# Altium PCB TankNode-PcbDoc.PcbDoc (part 1 of 2)
Units mm, origin at the board's own origin, x right, y up, seen from the top; angles counter-clockwise.
Board outline 71.69 x 57.78 mm, 2 copper layers (Top Layer, Bottom Layer); 78 components, 47 nets, 269 pads, 343 vias.
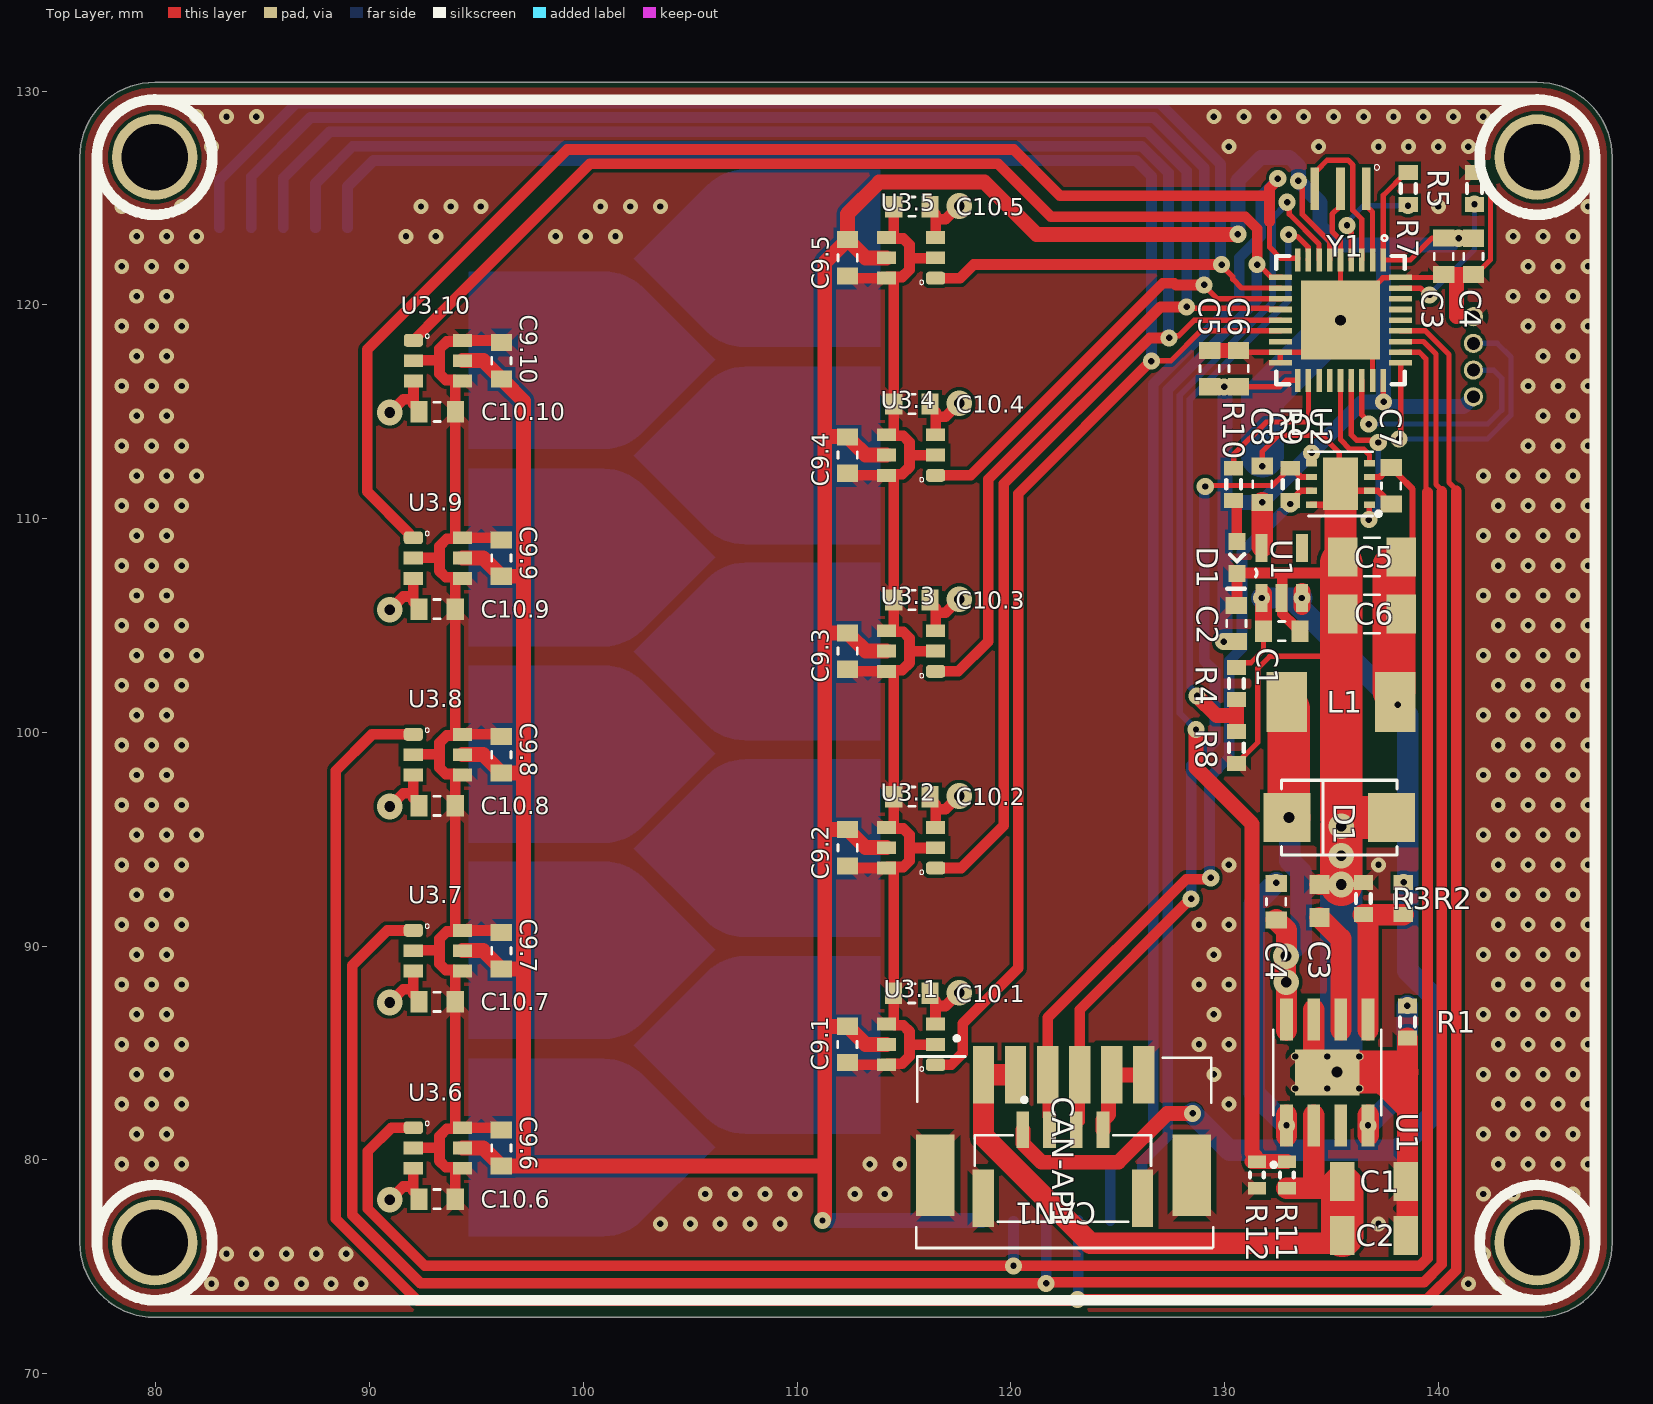
[diagram p0: Top Layer view]
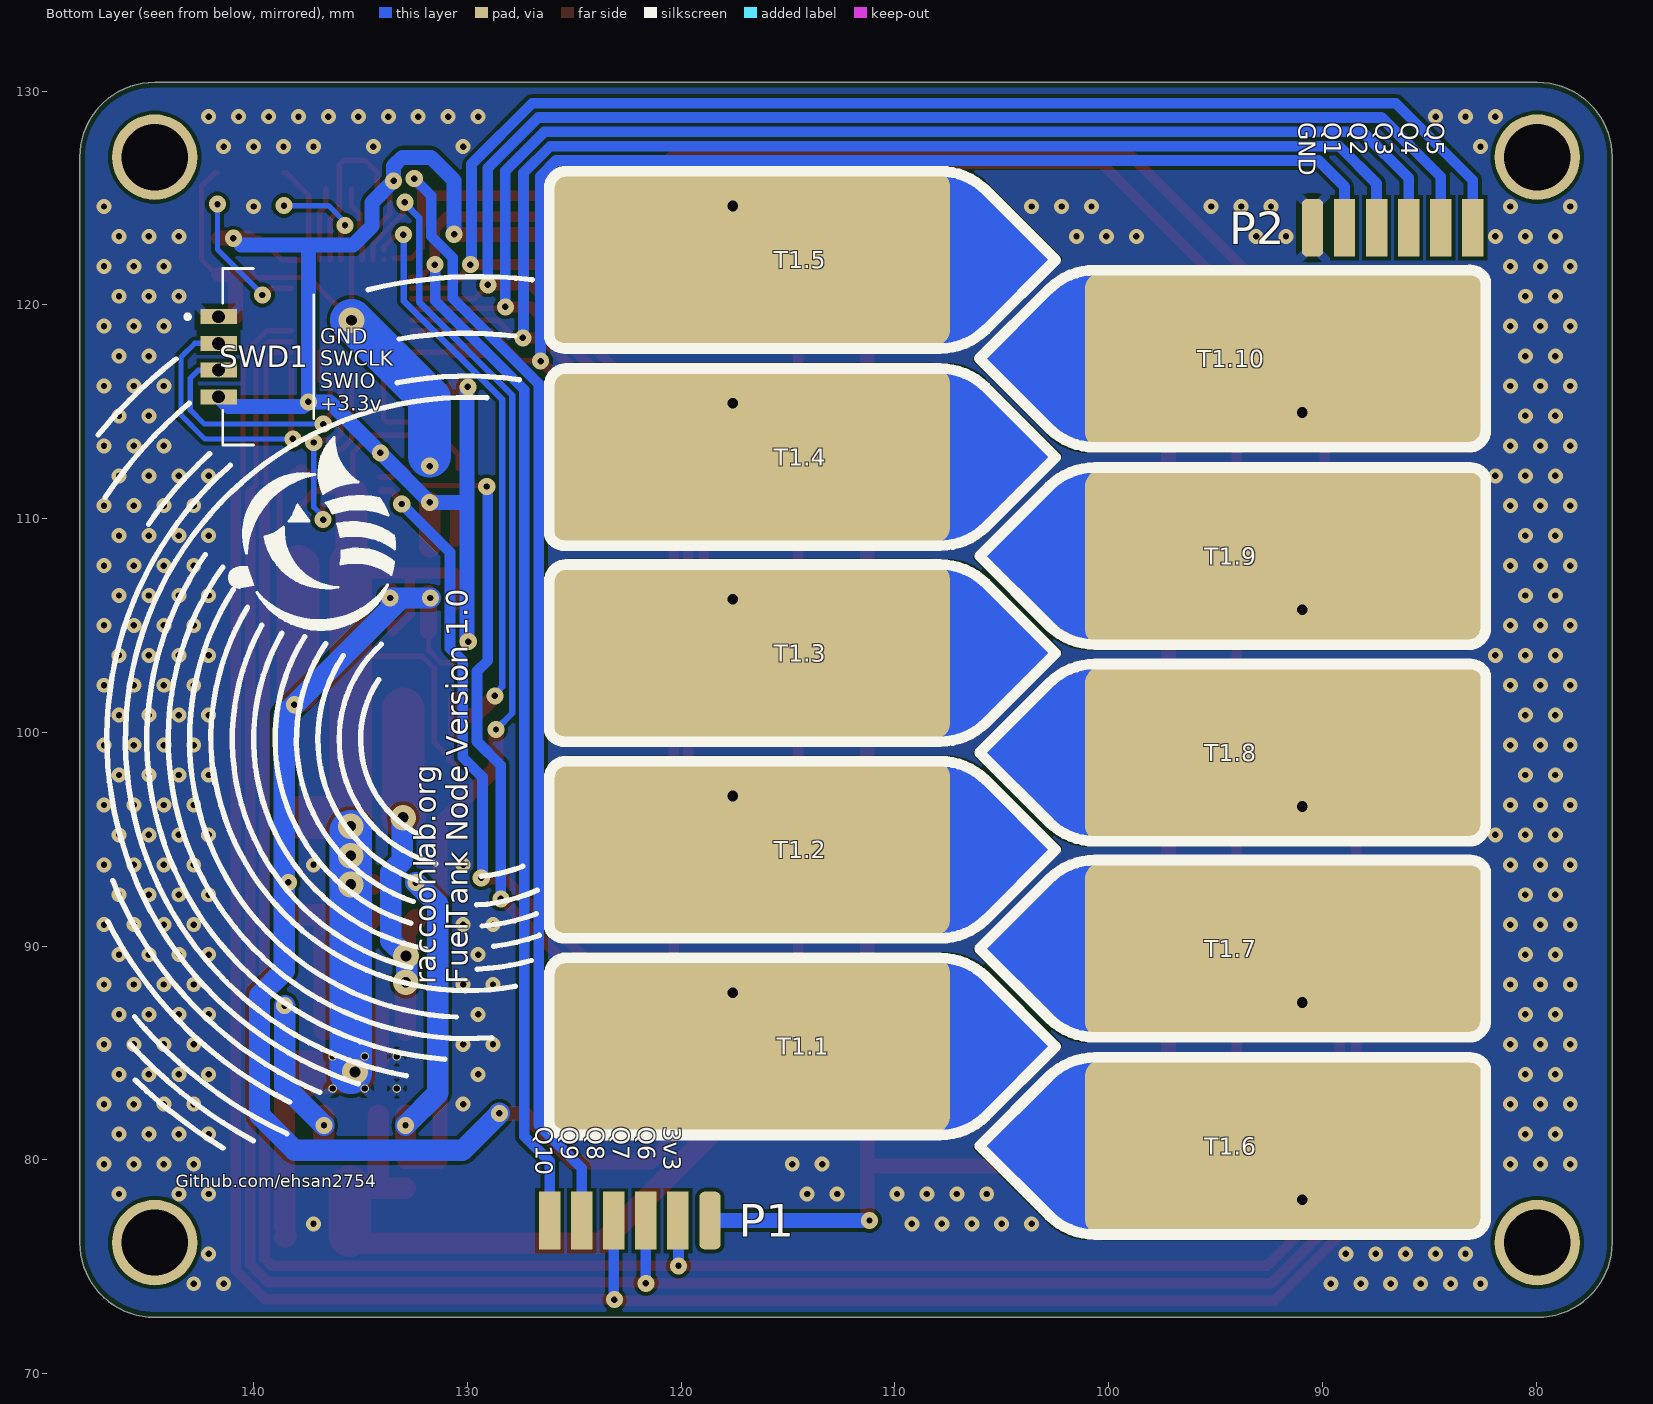
[diagram p1: Bottom Layer view, seen from below]
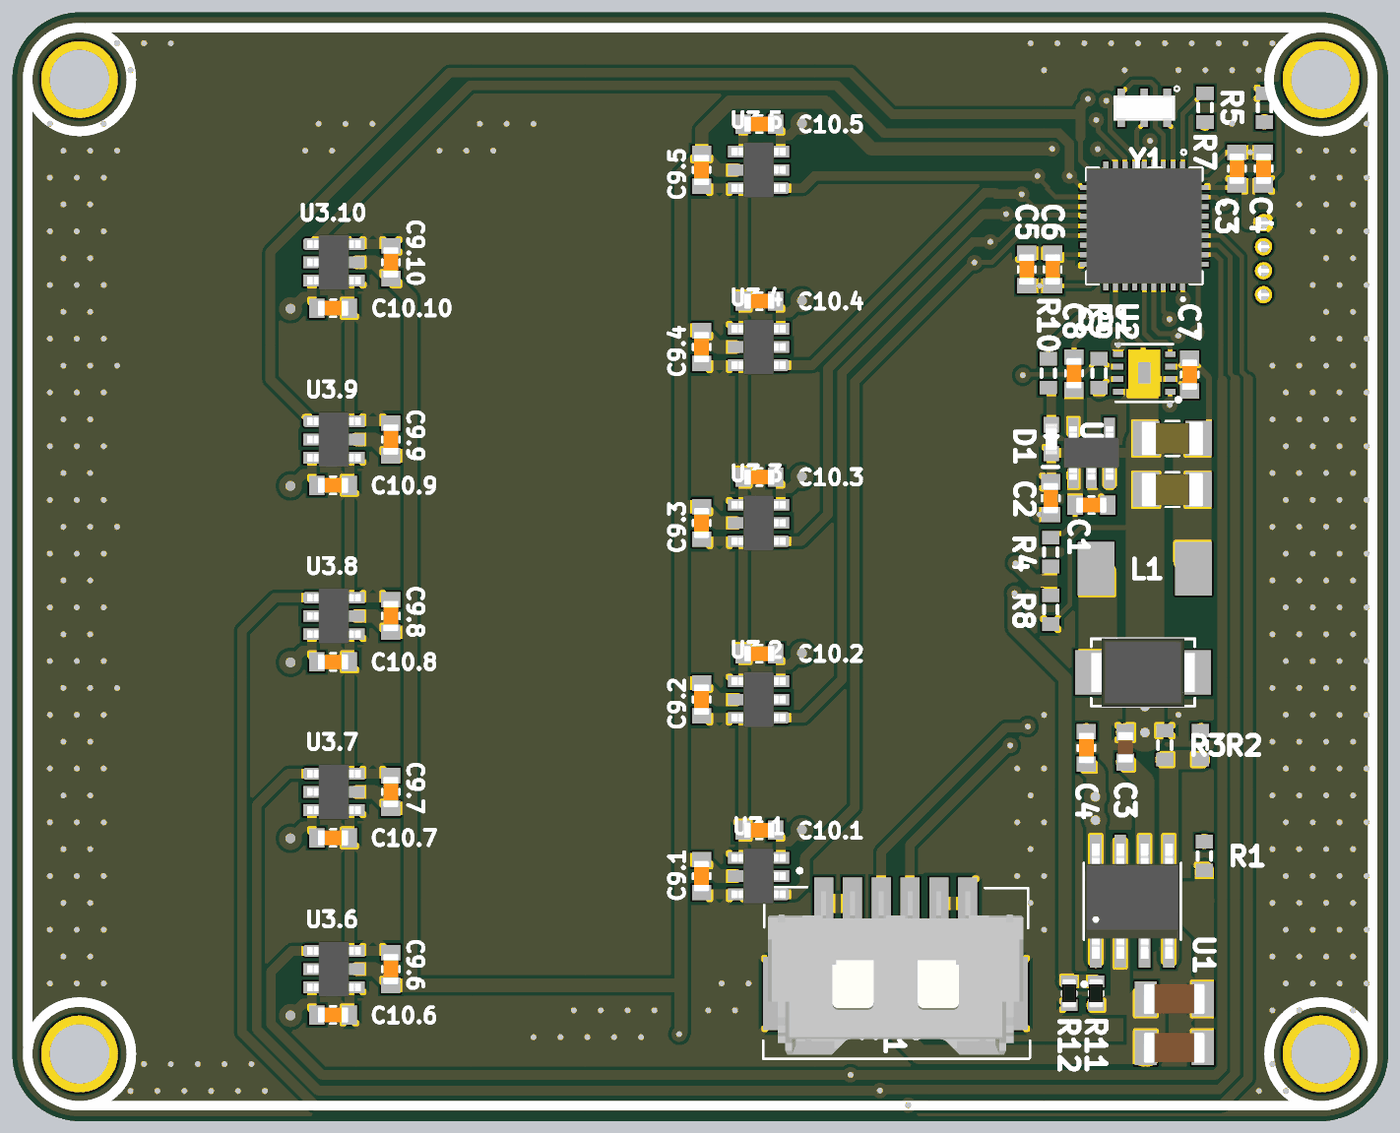
[diagram p3: 3D render of the assembled board from above, using the file's embedded part models]

## Layer stack, top to bottom
Top Solder: solder mask 0.0102, Solder Resist, Dk 3.5
Top Layer: signal copper 0.0356
Dielectric 1: dielectric 0.32, FR-4, Dk 4.8
Bottom Layer: signal copper 0.0356
Bottom Solder: solder mask 0.0102, Solder Resist, Dk 3.5

## Board outline
76.44,76.126 ccw(c79.94,76.126) 79.94,72.626 144.63,72.626 ccw(c144.63,76.126) 148.13,76.126 148.13,126.909 ccw(c144.63,126.909) 144.63,130.409 79.94,130.409 ccw(c79.94,126.909) 76.44,126.909

## Design rules (kind name [scope] priority, off if disabled: settings)
BoardOutlineClearance [All] p1: gap=0.25 ignorepadtopadclearanceinfootprint=FALSE
Clearance [All] p1: gap=0.17 ignorepadtopadclearanceinfootprint=FALSE
ComponentClearance [All] p1: gap=0.254 collisioncheckmode=3 verticalgap=2540 showdistances=FALSE
FanoutControl Fanout_SOIC [IsSOIC] p3: bgadir=Out bgaviamode=Closest fanoutstyle=Auto fanoutdirection=Alternating viagrid=0.025 // Fanout_SOIC (Default Rule)
FanoutControl Fanout_Small [(CompPinCount < 5)] p4: bgadir=Out bgaviamode=Closest fanoutstyle=Auto fanoutdirection=OutThenIn viagrid=0.025 // Fanout_Small (Default Rule)
FanoutControl Fanout_Default [All] p5: bgadir=In bgaviamode=Closest fanoutstyle=Auto fanoutdirection=Alternating viagrid=0.025 // Fanout_Default (Default Rule)
HoleSize [All] p1: absolutevalues=TRUE maxlimit=4.5 minlimit=0.3 maxpercent=80.000 minpercent=20.000
HoleToHoleClearance [All] p1: gap=0.4 allowstackedmicrovias=TRUE
MinimumSolderMaskSliver [All] p1: minsoldermaskwidth=0.15
PlaneClearance [All] p1: clearance=0.2
PlaneConnect [All] p1: planeconnectstyle=Relief reliefexpansion=0.5 reliefentries=4 reliefconductorwidth=0.2 reliefairgap=0.25
PolygonConnect PolygonConnect_1 [InNet('GND')] p1: connectstyle=Relief reliefconductorwidth=0.4 reliefentries=4 polygonreliefangle="45 Angle" airgapwidth=0.254
PolygonConnect [All] p2: connectstyle=Relief reliefconductorwidth=0.3 reliefentries=4 polygonreliefangle="90 Angle" airgapwidth=0.16
RoomDefinition TTP2234 [InComponentClass('TTP2234')] p1: confinementstyle=ConfineIn formatcopy=TRUE lockcomponents=FALSE outline 126.571,117.393 126.571,108.095 101.883,108.095 101.883,117.393
RoomDefinition TTP2235 [InComponentClass('TTP2235')] p2: confinementstyle=ConfineIn formatcopy=TRUE lockcomponents=FALSE outline 126.571,126.623 126.571,117.325 101.883,117.325 101.883,126.623
RoomDefinition TTP2232 [InComponentClass('TTP2232')] p3: confinementstyle=ConfineIn formatcopy=TRUE lockcomponents=FALSE outline 126.571,99.023 126.571,89.725 101.883,89.725 101.883,99.023
RoomDefinition TTP2233 [InComponentClass('TTP2233')] p4: confinementstyle=ConfineIn formatcopy=TRUE lockcomponents=FALSE outline 126.571,108.223 126.571,98.925 101.883,98.925 101.883,108.223
RoomDefinition [InComponentClass('Room Definition 1') vs False] p5: confinementstyle=ConfineIn formatcopy=TRUE lockcomponents=FALSE outline 76.5,72.6 148.2,72.6 148.2,130.4 76.5,130.4
RoomDefinition TTP2231 [InComponentClass('TTP2231')] p6: confinementstyle=ConfineIn formatcopy=TRUE lockcomponents=FALSE outline 126.568,89.82 126.568,80.522 101.88,80.522 101.88,89.82
RoomDefinition TTP2236 [InComponentClass('TTP2236')] p7: confinementstyle=ConfineIn formatcopy=TRUE lockcomponents=FALSE outline 81.849,75.997 81.849,85.295 106.537,85.295 106.537,75.997
RoomDefinition TTP2237 [InComponentClass('TTP2237')] p8: confinementstyle=ConfineIn formatcopy=TRUE lockcomponents=FALSE outline 81.849,85.227 81.849,94.525 106.537,94.525 106.537,85.227
RoomDefinition TTP2238 [InComponentClass('TTP2238')] p9: confinementstyle=ConfineIn formatcopy=TRUE lockcomponents=FALSE outline 81.849,94.397 81.849,103.695 106.537,103.695 106.537,94.397
RoomDefinition TTP2239 [InComponentClass('TTP2239')] p10: confinementstyle=ConfineIn formatcopy=TRUE lockcomponents=FALSE outline 81.849,103.597 81.849,112.895 106.537,112.895 106.537,103.597
RoomDefinition TTP22310 [InComponentClass('TTP22310')] p11: confinementstyle=ConfineIn formatcopy=TRUE lockcomponents=FALSE outline 81.852,112.83 81.852,122.128 106.54,122.128 106.54,112.83
RoutingCorners [All] p1: cornerstyle=45-Degree minsetback=2.5 maxsetback=2.5
RoutingPriority [All] p1 off: routingpriority=0
RoutingVias [All] p1: holewidth=0.3 width=0.7 viastyle="Through Hole" minholewidth=0.3 minwidth=0.7 maxholewidth=0.8 maxwidth=1.2
SilkToSilkClearance [All] p1: silktosilkclearance=0
SilkToSolderMaskClearance [IsPad] p1: minsilkscreentomaskgap=0 clearancetoexposedcopper=TRUE
SolderMaskExpansion [All] p1: expansion=0.1 istentingtop=FALSE
Width [All] p1: maxlimit=5 minlimit=0.17 preferedwidth=0.3
17 further rules are at their usual default settings.

## Classes and differential pairs
component class "Room Definition 1": C1 C2 C3 C4 C5 C6 C7 C8 CAN1 CAN-AP1 D1 DD1 L1 P1 R1 R2 R3 R4 R5 R7 R8 R9 R10 R11 R12 SWD1 U1 U2 Y1
component class TankNode-SchDoc: P1
channel class TTP223: TTP2231 TTP2232 TTP2233 TTP2234 TTP2235 TTP2236 TTP2237 TTP2238 TTP2239 TTP22310
net class Q[1..10]: Q1 Q2 Q3 Q4 Q5 Q6 Q7 Q8 Q9 Q10
component class TTP22310: C9.10 C10.10 T1.10 U3.10
component class TTP2239: C9.9 C10.9 T1.9 U3.9
component class TTP2238: C9.8 C10.8 T1.8 U3.8
component class TTP2237: C9.7 C10.7 T1.7 U3.7
component class TTP2236: C9.6 C10.6 T1.6 U3.6
component class TTP2235: C9.5 C10.5 T1.5 U3.5
component class TTP2234: C9.4 C10.4 T1.4 U3.4
component class TTP2233: C9.3 C10.3 T1.3 U3.3
component class TTP2232: C9.2 C10.2 T1.2 U3.2
component class TTP2231: C9.1 C10.1 T1.1 U3.1
component class STM32F103T8: C1 C2 C3 C4 C5 C6 C7 C8 CAN1 CAN-AP1 D1 DD1 R4 R5 R7 R8 R9 R10 R11 R12 SWD1 U1 U2 Y1
component class DCDC-LMR16030: C1 C2 C3 C4 C5 C6 D1 L1 R1 R2 R3 U1

## Components (designator, comment, footprint, x,y, rotation, side; value= is the part's Value field where it differs from the comment)
C1 "GX035C104MAT2-500" *CAPC1608X90 132.67,104.73 r0 top value=0.1u
C1 "GRM31CR71H225KA88L" *CAP3216X125N 136.987,78.991 r0 top value=2.2u
C2 "GX035C104MAT2-500" *CAPC1608X90 130.55,105.09 r90 top value=0.1u
C2 "GRM31CR71H225KA88L" *CAP3216X125N 136.987,76.451 r0 top value=2.2u
C3 "GX035C104MAT2-500" *CAPC1608X90 140.25,122.267 r270 top value=0.1u
C3 "GRM188R71C105KA12D" CAPC1608X90N 134.439,92.107 r270 top value=1u
C4 "GX035C104MAT2-500" *CAPC1608X90 141.64,122.263 r270 top value=0.1u
C4 "GX035C104MAT2-500" *CAPC1608X90 132.407,92.072 r90 top value=0.1u
C5 "GX035C104MAT2-500" *CAPC1608X90 129.3,117.015 r90 top value=0.1u
C5 "GRM31CR61A476KE15L" *CAPC3216X125N 136.89,108.201 r0 top value=47u
C6 "GX035C104MAT2-500" *CAPC1608X90 130.65,117.015 r90 top value=0.1u
C6 "GRM31CR61A476KE15L" *CAPC3216X125N 136.89,105.534 r0 top value=47u
C7 "GX035C104MAT2-500" *CAPC1608X90 137.79,111.53 r270 top value=0.1u
C8 "GX035C104MAT2-500" *CAPC1608X90 131.76,111.603 r90 top value=0.1u
C9.1 "GX035C104MAT2-500" *CAPC1608X90 112.354,85.396 r90 top value=0.1u (schematic designator C9)
C9.2 "GX035C104MAT2-500" *CAPC1608X90 112.357,94.599 r90 top value=0.1u (schematic designator C9)
C9.3 "GX035C104MAT2-500" *CAPC1608X90 112.357,103.799 r90 top value=0.1u (schematic designator C9)
C9.4 "GX035C104MAT2-500" *CAPC1608X90 112.357,112.969 r90 top value=0.1u (schematic designator C9)
C9.5 "GX035C104MAT2-500" *CAPC1608X90 112.357,122.199 r90 top value=0.1u (schematic designator C9)
C9.6 "GX035C104MAT2-500" *CAPC1608X90 96.163,80.551 r270 top value=0.1u (schematic designator C9)
C9.7 "GX035C104MAT2-500" *CAPC1608X90 96.163,89.781 r270 top value=0.1u (schematic designator C9)
C9.8 "GX035C104MAT2-500" *CAPC1608X90 96.163,98.951 r270 top value=0.1u (schematic designator C9)
C9.9 "GX035C104MAT2-500" *CAPC1608X90 96.163,108.151 r270 top value=0.1u (schematic designator C9)
C9.10 "GX035C104MAT2-500" *CAPC1608X90 96.166,117.384 r270 top value=0.1u (schematic designator C9)
C10.1 "GX035C104MAT2-500" *CAPC1608X90 115.364,87.786 r180 top value=22pf (schematic designator C10)
C10.2 "GX035C104MAT2-500" *CAPC1608X90 115.367,96.989 r180 top value=22pf (schematic designator C10)
C10.3 "GX035C104MAT2-500" *CAPC1608X90 115.367,106.189 r180 top value=22pf (schematic designator C10)
C10.4 "GX035C104MAT2-500" *CAPC1608X90 115.367,115.359 r180 top value=22pf (schematic designator C10)
C10.5 "GX035C104MAT2-500" *CAPC1608X90 115.367,124.589 r180 top value=22pf (schematic designator C10)
C10.6 "GX035C104MAT2-500" *CAPC1608X90 93.153,78.161 r0 top value=22pf (schematic designator C10)
C10.7 "GX035C104MAT2-500" *CAPC1608X90 93.153,87.391 r0 top value=22pf (schematic designator C10)
C10.8 "GX035C104MAT2-500" *CAPC1608X90 93.153,96.561 r0 top value=22pf (schematic designator C10)
C10.9 "GX035C104MAT2-500" *CAPC1608X90 93.153,105.761 r0 top value=22pf (schematic designator C10)
C10.10 "GX035C104MAT2-500" *CAPC1608X90 93.156,114.994 r0 top value=22pf (schematic designator C10)
CAN1 "502585-0670" MOLEX_502585-0670 122.467,83.777 r0 top
CAN-AP1 "SM04B-GHS-TB(LF)(SN)-" JST_SM04B-GHS-TB(LF)(SN)- 122.432,79.128 r0 top
D1 "0603-LED-BLUE" *LEDM1608X80_LTE-C1906R-14(Primary) 130.575,108.17 r90 top
D1 "SK56" *SMB_P6SMB62AT3G(Primary) 135.357,96.009 r180 top
DD1 "STM32F103T8" *QFN50P600X600X100-37N 135.42,119.28 r270 top
L1 "IHLP2020BZER100M01" IHLP 135.447,101.419 r180 top
P1 "Side Header 6" "6pin 1.5pitch" 122.399,77.057 r0 bottom
P2 "Side Header 6" "6pin 1.5pitch" 86.711,123.7 r180 bottom
R1 "Res3" J1-0603 138.557,86.443 r90 top value=56k
R2 "Res3" J1-0603 138.357,92.222 r90 top value=56k
R3 "RC0603FR-0710KL" J1-0603 136.49,92.222 r270 top value=10k
R4 "RC0603FR-0710KL" J1-0603 130.55,102.28 r90 top value=10k
R5 "RC0603FR-0710KL" J1-0603 141.69,125.443 r270 top value=10k
R7 "RC0603FR-0710KL" J1-0603 138.59,125.443 r270 top value=10k
R8 "RC0603FR-0710KL" J1-0603 130.55,99.28 r90 top value=10k
R9 "Res3" J1-0603 133.07,111.603 r270 top value=120
R10 "Res3" J1-0603 130.42,111.603 r270 top value=330
R11 "180K" "RES 0603 (1608X06L)" 132.91,79.91 r270 top
R12 "10K" "RES 0603 (1608X06L)" 131.51,78.666 r90 top
SWD1 "BM04B-GHS-TBT(LF)(SN)(N)" JST_BM04B-GHS-holes 138.289,117.57 r90 bottom
T1.1 "touchpad" TANKSENSOR 116.724,85.546 r180 bottom (schematic designator T1)
T1.2 "touchpad" TANKSENSOR 116.727,94.749 r180 bottom (schematic designator T1)
T1.3 "touchpad" TANKSENSOR 116.727,103.949 r180 bottom (schematic designator T1)
T1.4 "touchpad" TANKSENSOR 116.727,113.119 r180 bottom (schematic designator T1)
T1.5 "touchpad" TANKSENSOR 116.727,122.349 r180 bottom (schematic designator T1)
T1.6 "touchpad" TANKSENSOR 91.793,80.401 r0 bottom (schematic designator T1)
T1.7 "touchpad" TANKSENSOR 91.793,89.631 r0 bottom (schematic designator T1)
T1.8 "touchpad" TANKSENSOR 91.793,98.801 r0 bottom (schematic designator T1)
T1.9 "touchpad" TANKSENSOR 91.793,108.001 r0 bottom (schematic designator T1)
T1.10 "touchpad" TANKSENSOR 91.796,117.234 r0 bottom (schematic designator T1)
U1 "SPX3819M5-L-3-3/TR" *SOT95P280X145-5N 132.67,107.45 r90 top value=3V3
U1 "LMR16030SDDAR" "*SOIC127P600X170-9N - duplicate" 134.801,84.083 r90 top
U2 "TJA1042" SOT782-1 135.42,111.62 r90 top
U3.1 "TTP223-BA6" SOT23-6 115.324,85.396 r90 top (schematic designator U3)
U3.2 "TTP223-BA6" SOT23-6 115.327,94.599 r90 top (schematic designator U3)
U3.3 "TTP223-BA6" SOT23-6 115.327,103.799 r90 top (schematic designator U3)
U3.4 "TTP223-BA6" SOT23-6 115.327,112.969 r90 top (schematic designator U3)
U3.5 "TTP223-BA6" SOT23-6 115.327,122.199 r90 top (schematic designator U3)
U3.6 "TTP223-BA6" SOT23-6 93.193,80.551 r270 top (schematic designator U3)
U3.7 "TTP223-BA6" SOT23-6 93.193,89.781 r270 top (schematic designator U3)
U3.8 "TTP223-BA6" SOT23-6 93.193,98.951 r270 top (schematic designator U3)
U3.9 "TTP223-BA6" SOT23-6 93.193,108.151 r270 top (schematic designator U3)
U3.10 "TTP223-BA6" SOT23-6 93.196,117.384 r270 top (schematic designator U3)
Y1 "CSTCE8M00G55-R0" *OSC_CSTCE8M00G55-R0 135.42,125.43 r180 top

## Footprints (in the part's own frame and the unit in brackets; to place one, negate y for a bottom-side part, rotate by r counter-clockwise, add the part's x,y. Pads: shape width x height; smd on the part's side, far side on the other; paste and mask are expansions set on the pad)
"6pin 1.5pitch" [mm]
  rrect50% 1x2.7 smd: 1(-3.75,-0.1)
  rect 1x2.7 smd: 2(-2.25,-0.1) 3(-0.75,-0.1) 4(0.75,-0.1) 5(2.25,-0.1) 6(3.75,-0.1)
*CAP3216X125N [mm]
  rect 1.15x1.82 smd: 1(-1.485,0) 2(1.485,0)
  body extent -1.6,-0.8 1.6,0.8, height 1.22
*CAPC1608X90 [mm]
  rect 0.8x1 smd: 1(-0.85,0) 2(0.85,0)
  silkscreen extent -0.15,-0.45 0.15,0.45, body extent -0.8,-0.4 0.8,0.41, height 0.88
*CAPC3216X125N [mm]
  rect 1.38x1.82 smd: 1(-1.369,0) 2(1.369,0)
  silkscreen extent -0.36,-0.9 0.36,0.9, body extent -1.6,-0.87 1.6,0.87, height 1.71
*LEDM1608X80_LTE-C1906R-14(Primary) [mm]
  rect 0.8x0.8 smd: A(0.75,0) C(-0.75,0)
  silkscreen extent -1.45,-0.38 0.16,0.45, body extent -0.8,-0.3 0.8,0.3, height 1.15
*OSC_CSTCE8M00G55-R0 [mm]
  rect 0.4x2 smd: 1(-1.2,0) 2(0,0) 3(1.2,0)
  silkscreen extent -1.83,-1.13 -1.57,-0.87, body extent -1.6,-0.65 1.6,0.65, height 1
*QFN50P600X600X100-37N [mm]
  rect 1.08x0.26 smd: 1(-2.815,2) 2(-2.815,1.5) 3(-2.815,1) 4(-2.815,0.5) 5(-2.815,0) 6(-2.815,-0.5) 7(-2.815,-1) 8(-2.815,-1.5) 9(-2.815,-2) 19(2.815,-2) 20(2.815,-1.5) 21(2.815,-1) 22(2.815,-0.5) 23(2.815,0) 24(2.815,0.5) 25(2.815,1) 26(2.815,1.5) 27(2.815,2)
  rect 0.26x1.08 smd: 10(-2,-2.815) 11(-1.5,-2.815) 12(-1,-2.815) 13(-0.5,-2.815) 14(0,-2.815) 15(0.5,-2.815) 16(1,-2.815) 17(1.5,-2.815) 18(2,-2.815) 28(2,2.815) 29(1.5,2.815) 30(1,2.815) 31(0.5,2.815) 32(0,2.815) 33(-0.5,2.815) 34(-1,2.815) 35(-1.5,2.815) 36(-2,2.815)
  rect 3.7x3.7 smd: 37(0,0)
  silkscreen extent -3.97,-3 3,3, body extent -3,-3 3,3, height 1
*SMB_P6SMB62AT3G(Primary) [mm]
  rect 2.2x2.3 smd: A(-2.45,0) C(2.45,0)
  silkscreen extent -2.7,-1.75 2.7,1.75, body extent -2.72,-1.78 2.72,1.78, height 2.49
"*SOIC127P600X170-9N - duplicate" [mm]
  rect 1.97x0.6 smd: 1(-2.475,1.905) 2(-2.475,0.635) 3(-2.475,-0.635) 4(-2.475,-1.905) 5(2.475,-1.905) 6(2.475,-0.635) 7(2.475,0.635) 8(2.475,1.905)
  round 0.4 hole 0.3: 9(-0.75,1.5) 9(-0.75,0) 9(-0.75,-1.5) 9(0.75,1.5) 9(0.75,0) 9(0.75,-1.5)
  rect 2.13x3 smd: 9(0,0)
  silkscreen extent -4.42,-2.52 2,2.6, body extent -3,-2.45 3,2.45, height 1.69
*SOT95P280X145-5N [mil]
  rect 52x22 smd: 1(-46,37) 2(-46,0) 3(-46,-37) 4(46,-37) 5(46,37)
  silkscreen extent -7,46 7,48, body extent -55,-57 55,57, height 57
CAPC1608X90N [mm]
  rect 0.89x0.93 smd: 1(-0.77,0) 2(0.77,0)
  body extent -0.8,-0.4 0.8,0.4, height 0.9
IHLP [mil]
  rect 75x110 smd: 1(-100,0) 2(100,0)
  body extent -100,-100 100,100, height 79
J1-0603 [mm] "Chip Resistor, Body 1.6x0.8mm, IPC High Density"
  rect 0.7x0.9 smd: 1(-0.75,0) 2(0.75,0)
  silkscreen extent -0.2,-0.35 0.2,0.35, body extent -0.85,-0.48 0.85,0.48, height 0.9
JST_BM04B-GHS-holes [mm]
  rect 0.7x1.7 / inner rect 0.6x1.7 / far side round 0.9 hole 0.6: 1(1.875,3.35) 2(0.625,3.35) 3(-0.625,3.35) 4(-1.875,3.35)
  silkscreen extent -4.13,-1.1 4.13,4.9, body extent -4.12,-1.02 4.12,3.93, height 4.15
JST_SM04B-GHS-TB(LF)(SN)- [mm]
  rect 0.6x1.7 smd: 1(-1.875,2.275) 2(-0.625,2.275) 3(0.625,2.275) 4(1.875,2.275)
  rect 1x2.7 smd: SH1(-3.725,-0.925) SH2(3.725,-0.925)
  silkscreen extent -4.13,-2.02 4.13,3.77, body extent -4.06,-2.16 4.19,2.69, height 4.35
MOLEX_502585-0670 [mm]
  rect 1x2.7 smd: 1(-3.75,0.2) 2(-2.25,0.2) 3(-0.75,0.2) 4(0.75,0.2) 5(2.25,0.2) 6(3.75,0.2)
  rect 1.8x3.8 smd: P1(-6,-4.5) P2(6,-4.5)
  silkscreen extent -6.9,-7.9 7,2, body extent -6.65,-7.68 6.65,0.82, height 6.41
"RES 0603 (1608X06L)" [mm] "Chip Resistor, 2-Leads, Body 1.6x0.8mm, IPC High Density _ (0.063W)"
  rect 0.6x0.85 smd: 1(0,0) 2(1.244,0)
  silkscreen extent 0.52,-0.33 0.72,0.33, body extent -0.14,-0.38 1.38,0.38, height 0.45
SOT23-6 [mm]
  rrect50% 0.6x0.9 smd: 1(-0.95,-1.15)
  rect 0.6x0.9 smd: 2(0,-1.15) 3(0.95,-1.15) 4(0.95,1.15) 5(0,1.15) 6(-0.95,1.15)
  silkscreen extent -1.25,-0.6 -1.05,-0.4, body extent -1.45,-1.4 1.45,1.4, height 1.44
SOT782-1 [mm]
  rect 0.3x0.525 smd: 1(-0.975,-1.362) 2(-0.325,-1.362) 3(0.325,-1.362) 4(0.975,-1.362) 5(0.975,1.362) 6(0.325,1.362) 7(-0.325,1.362) 8(-0.975,1.362)
  rect 2.45x1.65 smd paste-2: P$9(0,0)
  silkscreen extent -1.5,-1.88 1.5,1.5, body extent -1.52,-1.52 1.52,1.52, height 0.85
TANKSENSOR [mm]
  rrect20% 18.75x8.3 smd paste+0 mask+0.102: 1(-0.06,-0.17)
  Top Layer region: 9.184,3.98 10.148,3.775 10.96,3.216 10.96,3.216 14.366,-0.19 10.98,-3.576 10.156,-4.127 9.184,-4.32 9.184,-4.32 2.836,-4.32 2.836,3.98
  silkscreen extent -9.44,-4.39 14.24,3.9

## Part data
C1 C2 C3 C4 C4 C5 C6 C7 C8 C9.1 C9.2 C9.3 C9.4 C9.5 C9.6 C9.7 C9.8 C9.9 C9.10 C10.1 C10.2 C10.3 C10.4 C10.5 C10.6 C10.7 C10.8 C10.9 C10.10: "Cap Thin Film 0.1uf 50v 0603", Package="0603 AVX", MF=AVX, Pacage Metric=1608, SnapEDA_Link=https://www.snapeda.com/parts/GX035C104MAT2-500/AVX/view-part/?ref=snap, Type=SMD
  C1 C2: MP=GX035C104MAT2-500
  C3 C4 C4 C5 C6 C7 C8 C9.1 C9.2 C9.3 C9.4 C9.5 C9.6 C9.7 C9.8 C9.9 C9.10 C10.1 C10.2 C10.3 C10.4 C10.5 C10.6 C10.7 C10.8 C10.9 C10.10: MP="GX035C104MAT2-500 or CL10B104JB8NNNC"
C1 C2: "1206 2.2 uF 50 V В±10% Tolerance X7R SMT Multilayer Ceramic Capacitor", Package="1206 Murata", MF="Murata Electronics", MP=GRM31CR71H225KA88L, SnapEDA_Link=https://www.snapeda.com/parts/GRM31CR71H225KA88L/Murata%20Electronics%20North%20America/view-part/?ref=snap, Type=SMD
C3: "SMD Capacitor X7R(EIA) with Capacitance: 1.0uF Tol. 10%. Rated Voltage: 16Vdc", Package=0603, ChipDip_Link=https://www.chipdip.ru/product/grm188r71c105ka12d, HelpURL=https://static.chipdip.ru/lib/428/DOC005428493.pdf, MF="Murata Electronics", MP=GRM188R71C105KA12D, Pacage Metric=1608, SnapEDA_Link=https://www.snapeda.com/parts/GRM188R71C105KA12D/Murata%20Electronics%20North%20America/view-part/228340/?ref=snap, Type=SMD
C5 C6: "Multilayer Ceramic Capacitor, GRM Series, 47 - F, - 10%, X5R, 10 V, 1206 [3216 Metric]", Package="1206 Murata Electronics", MF="Murata Electronics", MP=GRM31CR61A476KE15L, SnapEDA_Link=https://www.snapeda.com/parts/GRM31CR61A476KE15L/Murata%20Electronics%20North%20America/view-part/?ref=snap, Type=SMD
CAN1: "1.50mm Pitch, CLIK-Mate PCB Receptacle, Single Row, Surface Mount, Right-Angle, Tin Plating, Positive Lock, 6 Circuits, Natural", Package=None, MF=Molex, MP=502585-0670, SnapEDA_Link=https://www.snapeda.com/parts/502494-0670/Molex/view-part/?ref=snap, System=Connector, Type=SMD
CAN-AP1: "Connector Header Surface Mount, Right Angle 4 position 0.049 _1.25mm_", Package=None, ChipDip_Link=https://www.chipdip.ru/product/sm04b-ghs-tb-lf-sn-gh-1.25mm-header-side-ent, HelpURL=http://www.farnell.com/datasheets/2082975.pdf, MF="JST Sales", MP=SM04B-GHS-TB(LF)(SN), SnapEDA_Link=https://www.snapeda.com/parts/SM04B-GHS-TB%28LF%29%28SN%29-/JST%20Sales%20America%20Inc./view-part/2759740/?ref=snap, System=Connector
D1: library part LTE-C1906R-14, "LED IrLED Chip LED 2-Pin SMD T/R", Package="0603 Lite-On", MP=0603-LED-BLUE, SnapEDA_Link=https://www.snapeda.com/parts/LTE-C1906R-14/Lite-On%20Inc./view-part/?ref=snap, Type=SMD
D1: "Диод Шоттки 5А 60В [SMB / DO-214AA]", Package="DO-214 Littelfuse", ChipDip_Link=https://www.chipdip.ru/product/sk56, MF="Littelfuse Inc.", MP=SK56, SnapEDA_Link=https://www.snapeda.com/parts/P6SMB62AT3G/Littelfuse%20Inc./view-part/?ref=snap, Type=SMD
DD1: "STM32F103T8U6, Микроконтроллер 32BIT ARM 64K FLASH [VFQFPN-36]", Package=VFQFPN-36, ChipDip_Link=https://www.chipdip.ru/product/stm32f103t8u6-2, HelpURL=http://www.st.com/stonline/products/literature/ds/13587.pdf, MF=STM, MP=STM32F103T8U6, SnapEDA_Link=https://www.snapeda.com/parts/STM32F103T8U6TR/STMicroelectronics/view-part/?ref=search&t=STM32F103T8U6, Type=SMD
L1: "10ÂµH Shielded Molded Inductor 2.3A 199mOhm Max Nonstandard", Package="Nonstandard Vishay", ChipDip_Link=https://www.chipdip.ru/product/ihlp2020bzer100m11-inductor-ihlp-smd-2020-10, HelpURL=http://www.vishay.com/docs/34253/ihlp-2020bz-01.pdf, MF="Vishay Dale", MP=IHLP2020BZER100M01, SnapEDA_Link=https://www.snapeda.com/parts/IHLP2020BZER100M01/Vishay%20Dale/view-part/44808/?ref=snap, Type=SMD
P1 P2: "Header, 4-Pin", LatestRevisionDate=17-Jul-2002, LatestRevisionNote="Re-released for DXP Platform.", Publisher="Altium Limited"
R1 R2 R10: "Resistor", Package=R0603, Pacage Metric=1608, Type=SMD
  R1 R2: ChipDip_Link=https://www.chipdip.ru/product0/9000079754, HelpURL=https://www.chipdip.ru/product0/9000079754, MP=RC0603FR-0756KL
  R10: ChipDip_Link=https://www.chipdip.ru/product0/9000079628, HelpURL=https://www.chipdip.ru/product0/9000079628, MP=RC0603FR-07330RL
R3 R4 R5 R7 R8: "10 kOhms 1 0.1 W 1 10 W Chip Resistor 0603 1608 Metric Thick Film", Package=R0603, ChipDip_Link=https://www.chipdip.ru/product0/9000079736, HelpURL=https://www.chipdip.ru/product0/9000079736, MF="Yageo or NXP", MP="10K 1% 0603", Pacage Metric=1608, SnapEDA_Link=https://www.snapeda.com/parts/RC0603FR-0710KL/Yageo/view-part/?ref=dk&t=RC0603FR-0710KL&con_ref=None, Type=SMD
R9: "120 Ohms 1 0.1 W 1 10 W Chip Resistor 0603 1608 Metric Thick Film", Package=R0603, ChipDip_Link=https://www.chipdip.ru/product0/9000079618, HelpURL=https://www.chipdip.ru/product0/9000079618, MP=RC0603FR-07120RL, Pacage Metric=1608, Type=SMD
R11 R12: library part Resistor, "Resistor", Power="1/8 W", Tolerance=5%
SWD1: "Conn Shrouded Header HDR 4 POS 1.25mm Solder ST SMD Reel", Package=None, Instructions="Do not install", MF="JST Sales", MP=SM04B-GHS-TB(LF)(SN), SnapEDA_Link=https://www.snapeda.com/parts/BM04B-GHS-TBT%28LF%29%28SN%29%28N%29/JST%20Sales%20America%20Inc./view-part/?ref=snap, System=Connector, Type=SMD
U1: library part SPX3819M5-L, "Low Dropout Voltage Regulator, Adjustable 0.5A, В±1%, 2.5 to 16 Vin, 5-Pin SOT-23", Package="SOT-23-5 Exar", ChipDip_Link=https://www.chipdip.ru/product1/8003455237, HelpURL=http://www.farnell.com/datasheets/2614478.pdf, MF="MaxLinear, Inc.", MP=SPX3819M5-L-3-3/TR, SnapEDA_Link=https://www.snapeda.com/parts/SPX3819M5-L/MaxLinear%2C%20Inc./view-part/?ref=snap, Type=SMD
U1: "LMR16030SDDAR, Conv DC-DC 4.3V to 60V Step Down Single-Out 1V to 50V 3A Automotive 8-Pin HSOP EP T/R", Package="PowerSOIC-8 Texas Instruments", ChipDip_Link=https://www.chipdip.ru/product1/8003448566, HelpURL=https://www.ti.com/lit/ds/symlink/lmr16030.pdf, MF="Texas Instruments", MP=LMR16030SDDAR, SnapEDA_Link=https://www.snapeda.com/parts/TPS54560DDA/Texas%20Instruments/view-part/?ref=snap, Type=SMD
U2: "1/1 Transceiver Half CANbus 8-SO", Package="VDFN-8 NXP USA", ChipDip_Link=https://www.chipdip.ru/product1/8002840332, HelpURL=https://static.chipdip.ru/lib/583/DOC001583059.pdf, MF="NXP USA", MP=TJA1042, SnapEDA_Link=https://www.snapeda.com/parts/TJA1042/NXP%20USA%20Inc./view-part/900919/?ref=snap, Type=SMD
Y1: "Ceramic Resonator 8MHz ??0.5% _Tol_ ??0.2% _Stability_ 33pF 40Ohm 3-Pin CSMD T/R", Package="SMD-3 Murata", ChipDip_Link=https://www.chipdip.ru/product1/8001783721, HelpURL=https://www.murata.com/en-eu/api/pdfdownloadapi?cate=&partno=CSTCE8M00G55-R0, MF=Murata, MP=CSTCE8M00G55-R0, SnapEDA_Link=https://www.snapeda.com/parts/CSTCE8M00G55-R0/Murata%20Electronics%20North%20America/view-part/?ref=snap, Type=SMD
U3.1 U3.2 U3.3 U3.4 U3.5 U3.6 U3.7 U3.8 U3.9 U3.10: ChipDip_Link=https://www.chipdip.ru/product/ttp223, HelpURL=https://static.chipdip.ru/lib/928/DOC012928792.pdf

## Free pads (board coordinates)
  round 4 hole 3.1: 1(144.63,126.909) 2(144.63,76.126) 3(79.94,76.126) 4(79.94,126.909)

## Via types
v1: diameter 0.7, hole 0.3, Top Layer to Bottom Layer, tented both sides, 280 vias
v2: diameter 0.8, hole 0.3, Top Layer to Bottom Layer, tented both sides, 45 vias
v3: diameter 1.2, hole 0.5, Top Layer to Bottom Layer, tented both sides, 18 vias

## Nets (pads, with @x,y where several pads share a name; then routed paths per layer and width w, separated by ;. In a path a pad name is that pad's centre, name@x,y a point inside that pad or via, vN(x,y) a via of type N, cw(c..) or ccw(c..) an arc to the next point about the centre after c; other vN are vias at no path point)
3.3: C2.1@130.55,104.24 C3.1@140.25,123.117 C4.1@141.64,123.113 C5.1@129.3,116.165 C6.1@130.65,116.165 C8.1 C9.1.2 C9.2.2 C9.3.2 C9.4.2 C9.5.2 C9.6.2 C9.7.2 C9.8.2 C9.9.2 C9.10.2 DD1.1 DD1.6 DD1.19 DD1.27 P1.1 R7.1 SWD1.4 U1.5@131.73,108.618 U2.5 U3.1.5 U3.2.5 U3.3.5 U3.4.5 U3.5.5 U3.6.5 U3.7.5 U3.8.5 U3.9.5 U3.10.5 | length 226.2
  Top Layer w0.25: C6.1@130.65,116.165 132.575,116.165 132.875,116.465 DD1.19@133.42,116.465 ; v2(133.45,125.8) 133.45,125.651 133.637,125.464 133.637,124.226 134.92,122.943 DD1.6@134.92,122.095 ; DD1.27@137.42,116.465 137.425,116.46 137.425,115.474 v2(137.44,115.459) ; R7.1@138.59,126.193 138.49,126.193 137.42,125.124 DD1.1@137.42,122.095 138.685,122.095 139.707,123.117 C3.1@140.25,123.117
  Top Layer w0.7: U3.6.5@94.343,80.551 95.313,80.551 96.013,79.851 96.013,79.751 96.063,79.701 C9.6.2@96.163,79.701 97.31,79.701 ; U3.7.5@94.343,89.781 95.313,89.781 96.013,89.081 96.013,88.981 96.063,88.931 C9.7.2@96.163,88.931 96.168,88.926 97.144,88.926 97.19,88.88 ; U3.8.5@94.343,98.951 95.313,98.951 96.013,98.251 96.013,98.151 96.063,98.101 C9.8.2@96.163,98.101 97.161,98.101 97.19,98.13 ; U3.9.5@94.343,108.151 95.313,108.151 96.013,107.451 96.013,107.351 96.063,107.301 C9.9.2@96.163,107.301 97.161,107.301 97.19,107.33 ; U3.10.5@94.346,117.384 95.316,117.384 96.016,116.684 96.016,116.584 96.066,116.534 C9.10.2@96.166,116.534 96.266,116.534 96.316,116.484 96.316,116.384 97.19,115.51 97.19,107.33 ; v2(111.187,77.157) 111.187,77.184 111.29,77.287 111.29,79.82 ; 111.469,95.449 C9.2.2@112.357,95.449 112.457,95.449 112.507,95.399 112.507,95.299 113.207,94.599 U3.2.5@114.177,94.599 ; U3.1.5@114.174,85.396 113.204,85.396 112.504,86.096 112.504,86.196 112.454,86.246 C9.1.2@112.354,86.246 111.364,86.246 111.29,86.32 ; U3.3.5@114.177,103.799 113.207,103.799 112.507,104.499 112.507,104.599 112.457,104.649 C9.3.2@112.357,104.649 111.299,104.649 111.29,104.64 ; U3.4.5@114.177,112.969 113.207,112.969 112.507,113.669 112.507,113.769 112.457,113.819 C9.4.2@112.357,113.819 112.336,113.84 111.29,113.84 ; U3.5.5@114.177,122.199 113.207,122.199 112.507,122.899 112.507,122.999 112.457,123.049 C9.5.2@112.357,123.049 ; v2@129.975,116.165 C6.1@130.65,116.165 ; v2(130.623,123.3) 121.2,123.3 118.761,125.739 113.839,125.739 112.357,124.257 C9.5.2@112.357,123.049 ; C3.1@140.25,123.117 C3.1@140.25,123.117 v2(140.945,123.115) 141.638,123.115 C4.1@141.64,123.113 ; 97.19,88.88 97.19,79.821 97.31,79.701 ; 97.19,88.88 97.19,98.13 ; 97.19,98.13 97.19,107.33 ; 97.31,79.701 111.171,79.701 111.29,79.82 ; 111.29,79.82 111.29,86.32 ; 111.29,86.32 111.29,104.64 ; 111.29,104.64 111.29,113.84 ; 111.29,113.84 111.29,121.983 C9.5.2@112.357,123.049
  Top Layer w1: U1.5@131.76,108.68 v2(131.76,110.753)
  Bottom Layer w0.7: v2(111.187,77.157) P1.1@118.649,77.157 ; v2(129.96,104.24) 129.96,104.267 130.015,104.322 130.015,110.753 ; v2(129.977,116.163) 129.996,116.144 129.996,116.073 130.015,116.054 130.015,110.753 ; v2(130.623,123.3) 130.623,125.823 131.7,126.9 133.04,126.9 133.45,126.49 v2(133.45,125.8) 134.459,124.791 134.459,123.68 135.344,122.795 137.44,122.795 ; 140.597,122.795 137.44,122.795 ; SWD1.4@141.639,115.695 141.178,115.234 137.692,115.234 137.467,115.459 v2(137.44,115.459) ; 130.015,110.753 v2(131.76,110.753) 131.76,110.767 v2(134.068,113.075) 136.452,115.459 v2(137.44,115.459) ; v2(137.44,115.459) 137.44,122.795
+5: C1.1@131.82,104.73 C5.2@138.259,108.201 C6.2@138.259,105.534 C7.1 CAN-AP1.1 L1.1 R2.2 R4.2 U1.1@131.73,106.282 U1.3@133.61,106.282 U2.3 | length 68.4
  Top Layer w0.25: R4.2@130.55,103.03 130.775,103.255 131.22,103.255 131.82,103.855 C1.1@131.82,104.73
  Top Layer w0.3: U2.3@136.783,111.945 137.264,111.945 137.44,112.121 137.44,112.13 137.69,112.38 C7.1@137.79,112.38 137.89,112.38 138.14,112.13 138.14,112.03 138.79,111.38 138.79,108.731 C5.2@138.259,108.201
  Top Layer w0.7: CAN-AP1.1@120.557,81.403 120.557,80.763 121.437,79.883 125.023,79.883 127.31,82.17 v2(128.5,82.17)
  Top Layer w0.8: C1.1@131.82,104.73 U1.1@131.82,106.49 ; U1.3@133.61,105.89 v2(133.61,106.282) ; U1.3@133.613,105.887 133.62,105.88 U1.3@133.62,106.59
  Top Layer w2: L1.1@137.92,101.935 C5.2@137.92,107.77
  Bottom Layer w1: v2(128.5,82.17) 130.232,80.438 138.068,80.438 139.727,82.097 139.727,87.688 138.57,88.845 138.57,100.81 v2(138.09,101.29) v2@133.25,106.13 ; v2(131.73,106.282) v2(133.61,106.282)
  other v2: 138.37,92.98
ADC_5V: DD1.8 R4.1 R8.2 | length 28.7
  Top Layer w0.25: v2(132.994,123.284) 133.085,123.193 133.409,123.193 133.915,122.688 DD1.8@133.915,122.549 ; DD1.8@133.915,122.1 DD1.8@133.92,122.095
  Top Layer w0.7: v2(128.71,101.7) 129.63,100.78 130.55,100.78 ; R8.2@130.55,100.03 130.55,100.78 ; R4.1@130.55,101.53 130.55,100.78
  Bottom Layer w0.3: v2(128.71,101.7) 128.71,101.791 128.375,102.126 128.375,115.579 132.974,120.178 132.974,123.264 v2(132.994,123.284)
ADC_VIN: DD1.7 R11.1 R12.2 | length 53.4
  Top Layer w0.25: v2(132.92,124.8) 133.025,124.695 133.025,124.236 134.415,122.846 134.415,122.1 DD1.7@134.42,122.095
  Top Layer w0.7: v2(128.66,100.13) 128.66,98.34 131.287,95.713 131.287,80.32 131.435,80.172 131.435,79.96 131.46,79.96 R12.2@131.51,79.91 ; R12.2@131.28,79.91 R11.1@132.91,79.91
  Bottom Layer w0.3: v2(128.66,100.13) 127.905,100.885 127.905,115.773 132.26,120.128 132.26,124.078 132.92,124.738 v2(132.92,124.8)
BOOT0: DD1.35 R5.2 | length 6.6
  Top Layer w0.25: DD1.35@138.235,120.78 139.156,120.78 139.476,120.46 v2(139.591,120.46) ; R5.2@141.69,124.693 v2(141.69,124.71)
  Bottom Layer w0.25: v2(139.591,120.46) 139.591,120.488 141.69,122.587 v2(141.69,124.71)
CAN_H: CAN1.3 CAN-AP1.2 R9.2 U2.7 | length 36.1
  Top Layer w0.3: R9.2@133.07,110.853 133.17,110.853 133.37,111.053 133.37,111.119 133.546,111.295 U2.7@134.058,111.295
  Top Layer w0.5: CAN-AP1.2@121.807,81.403 121.807,81.953 121.717,82.043 CAN1.3@121.717,83.977 121.717,86.647 128.2,93.13 129.078,93.13 129.08,93.133 129.293,93.133 v2(129.35,93.19) ; v2(133.07,110.68) R9.2@133.07,110.853
  Bottom Layer w0.5: v2(129.35,93.19) 129.293,93.247 129.293,93.46 129.29,93.462 129.29,97.9 130.22,98.83 130.22,100.81 130.217,100.813 130.217,103.337 130.81,103.93 130.81,108.42 v2(133.07,110.68)
CAN_L: CAN1.4 CAN-AP1.3 R9.1 U2.6 | length 38.2
  Top Layer w0.25: v2(129.095,111.5) 129.143,111.548 132.245,111.548 132.745,112.048 132.745,112.128 132.97,112.353 R9.1@133.07,112.353
  Top Layer w0.3: R9.1@133.07,112.353 133.17,112.353 133.37,112.153 133.37,112.121 133.546,111.945 U2.6@134.058,111.945
  Top Layer w0.5: CAN-AP1.3@123.14,81.72 123.217,81.797 123.217,87.017 128.405,92.205 v2(128.435,92.205)
  Bottom Layer w0.5: v2(128.435,92.205) 128.435,98.455 129.547,99.567 129.547,102.853 129.05,103.35 129.05,111.455 v2(129.095,111.5)
CAN_RXD: DD1.23 U2.4 | length 4.8
  Top Layer w0.25: DD1.23@135.42,116.465 135.42,113.69 135.871,113.239 136.511,113.239 136.776,112.974 136.776,112.601 U2.4@136.783,112.595
CAN_TXD: DD1.24 U2.1 | length 8.5
  Top Layer w0.25: DD1.24@135.92,116.465 135.92,113.927 136.188,113.659 137.084,113.659 v2(137.185,113.558) ; v2(136.75,109.95) 136.766,109.966 136.766,110.629 U2.1@136.783,110.645
  Bottom Layer w0.25: v2(136.75,109.95) 136.75,110.099 137.185,110.534 v2(137.185,113.558)
FB: R2.1 R3.2 U1.5@136.706,86.558 | length 7.4
  Top Layer w1: U1.5@136.706,86.07 U1.5@136.706,86.558 136.706,91.256 R3.2@136.49,91.472 R2.1@138.357,91.472